# Altium PCB multivibrator.PcbDoc
Units mm, origin at the board's own origin, x right, y up, seen from the top; angles counter-clockwise.
Board outline 500 x 500 mm, 2 copper layers (Top Layer, Bottom Layer); 9 components, 6 nets, 20 pads, 0 vias.
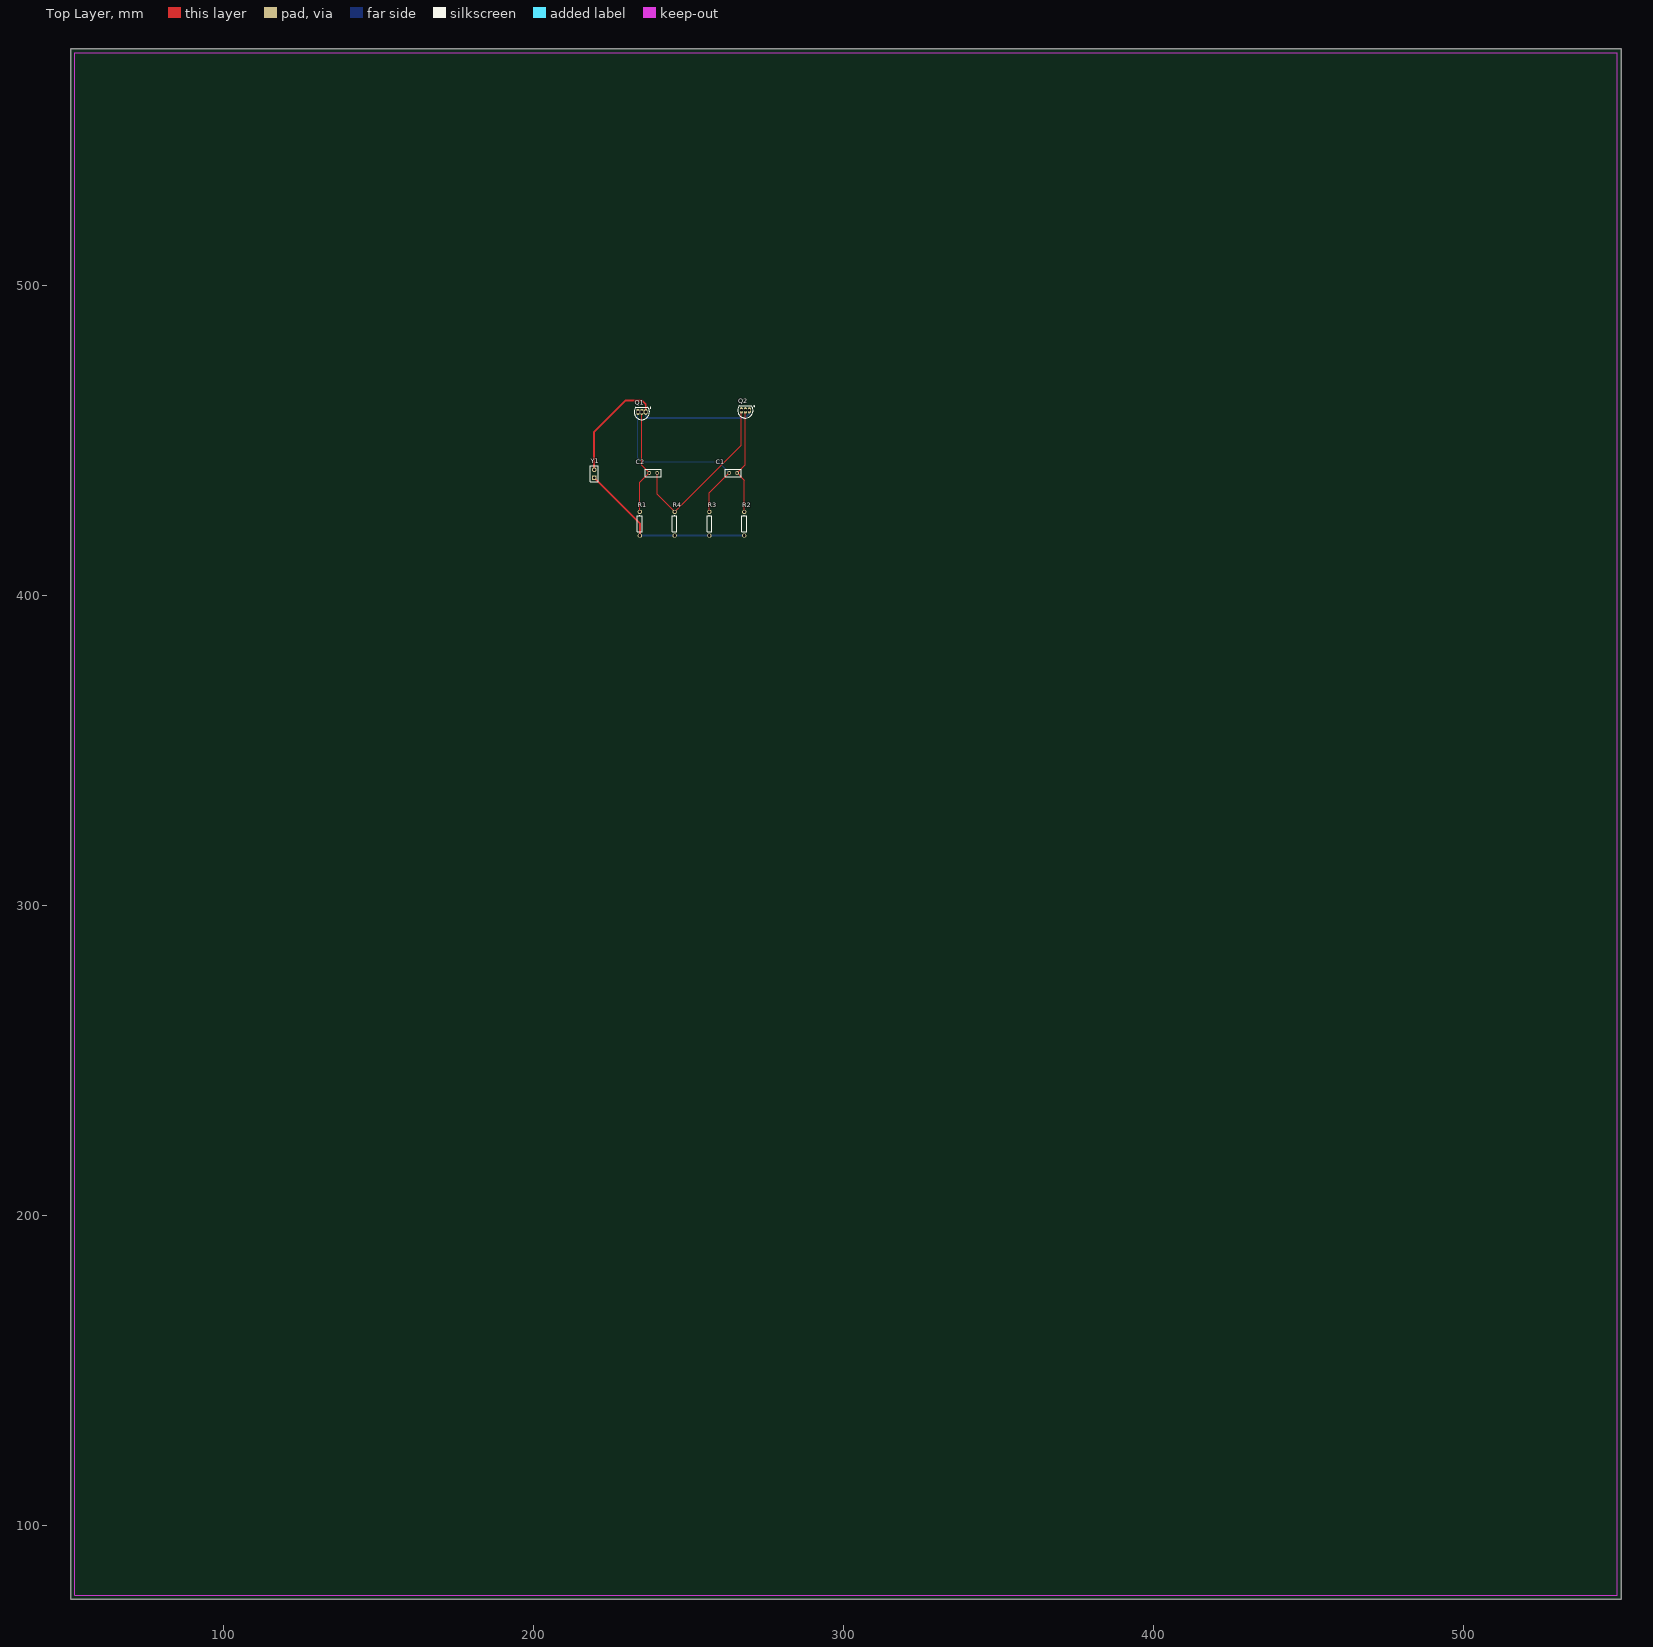
[diagram p0: Top Layer view]
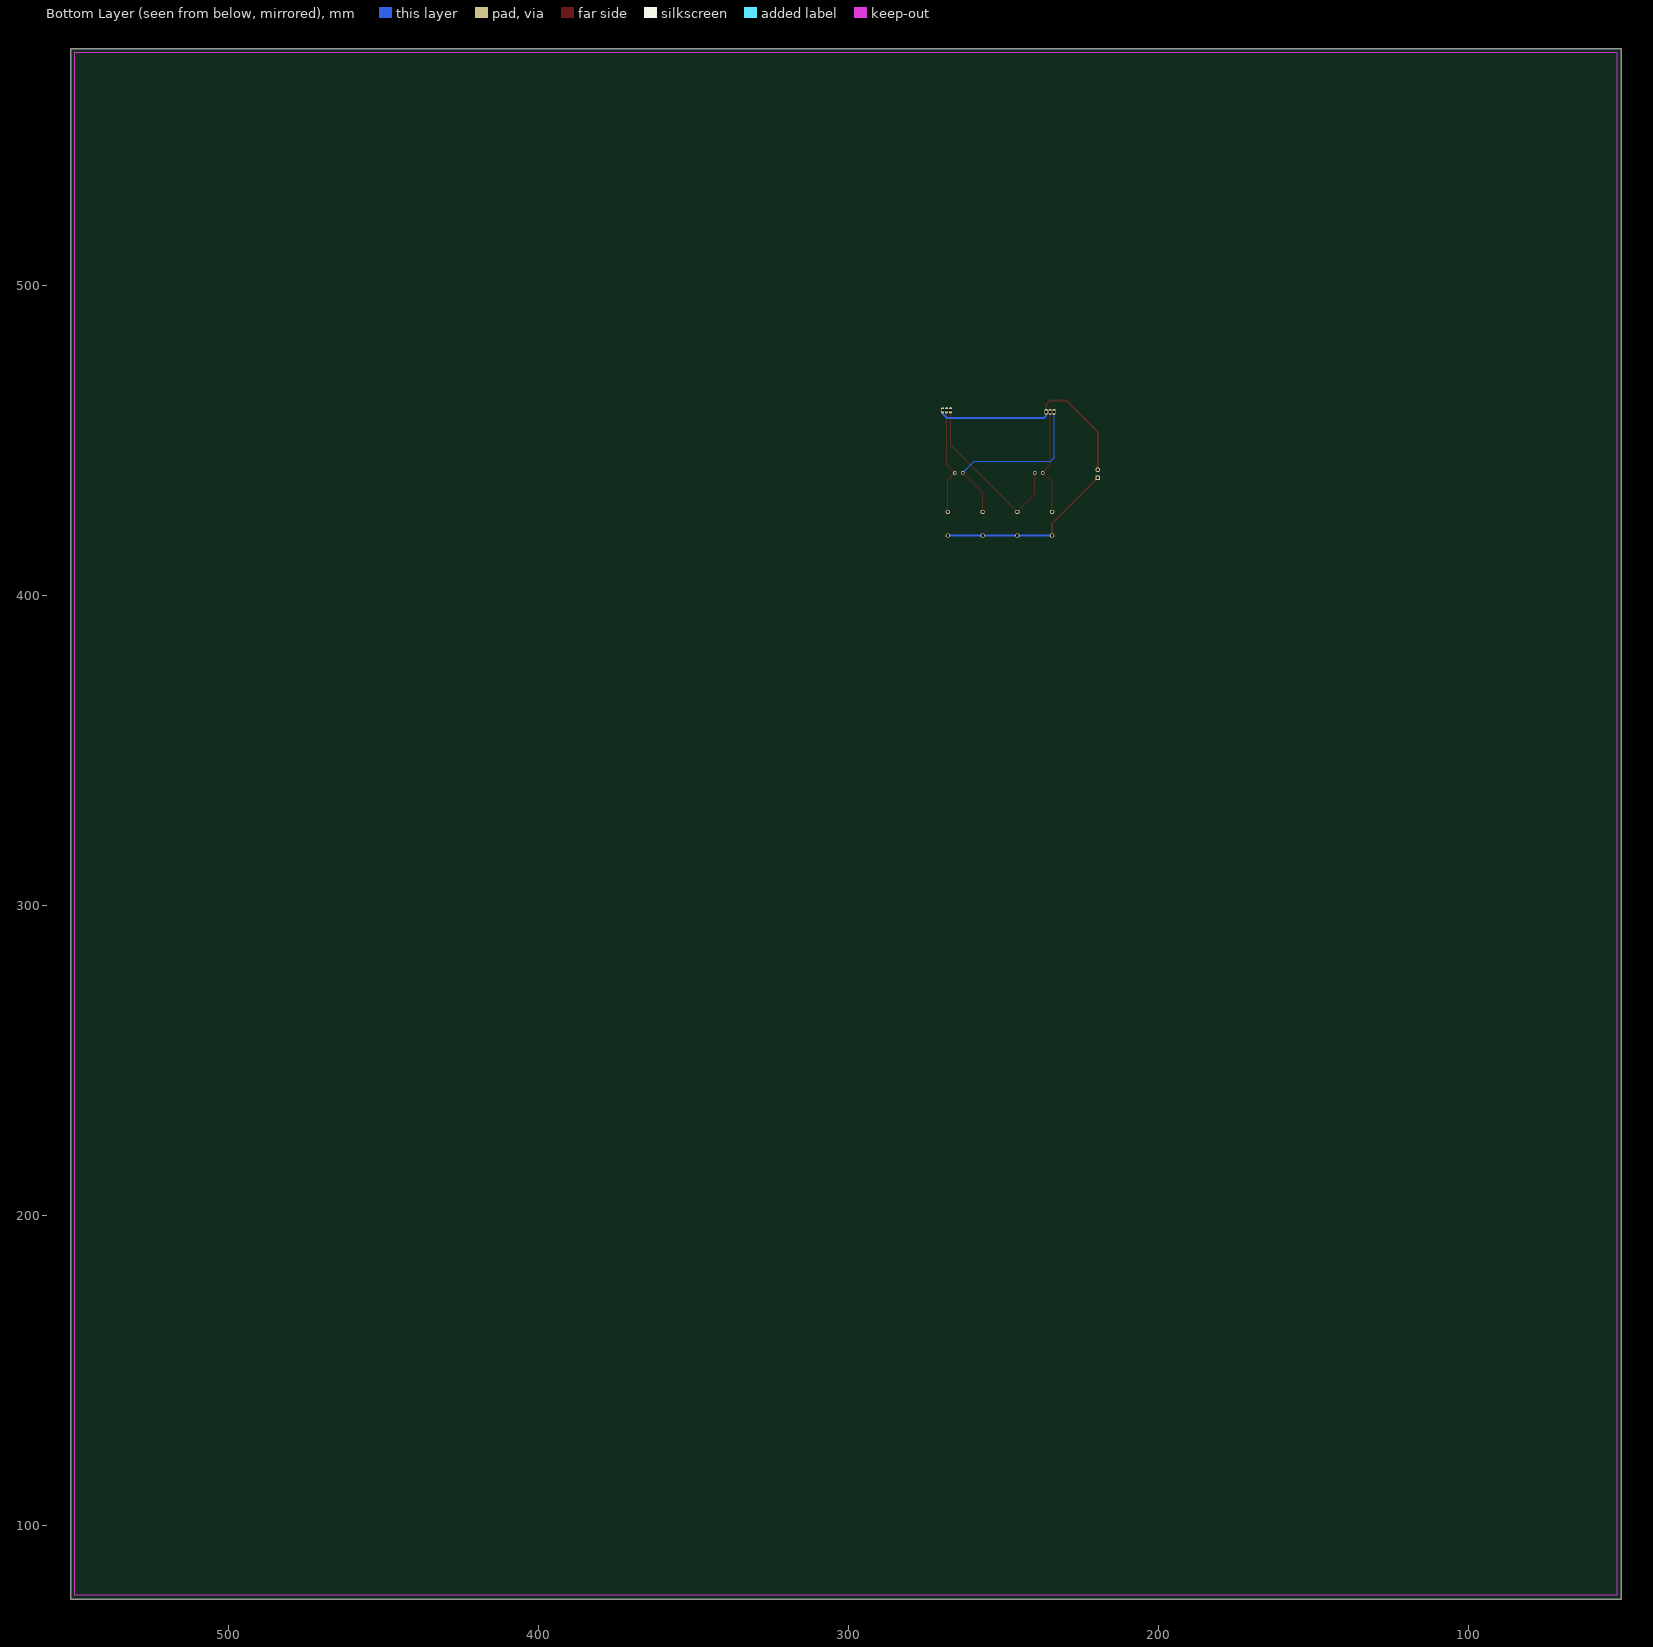
[diagram p1: Bottom Layer view, seen from below]

## Layer stack, top to bottom
Top Layer: signal copper 0.0356
Dielectric: dielectric 0.32, FR-4, Dk 4.8
Bottom Layer: signal copper 0.0356

## Board outline
50.8,76.2 550.8,76.2 550.8,576.2 50.8,576.2

## Design rules (kind name [scope] priority, off if disabled: settings)
Clearance Clearance_transistors [HasFootprint('TO-92A')] p1: gap=0.26
Clearance [All] p2: gap=0.3
MinimumSolderMaskSliver MinimumSolderMaskSliver_transistor [HasFootprint('TO-92A')] p1: minsoldermaskwidth=0.1
MinimumSolderMaskSliver [All] p2: minsoldermaskwidth=0.254
PolygonConnect [All] p1: connectstyle=Relief reliefconductorwidth=0.254 reliefentries=4 polygonreliefangle="90 Angle" airgapwidth=0.254
RoutingVias [All] p1: holewidth=0.8 width=1.6 viastyle="Through Hole" minholewidth=0.711 minwidth=1.27 maxholewidth=0.711 maxwidth=1.27
SilkToSolderMaskClearance [IsPad] p1: minsilkscreentomaskgap=0.24 clearancetoexposedcopper=TRUE
SolderMaskExpansion [All] p1: expansion=0.102
Width Width_power [(InNet('12V') OR InNet('GND'))] p1: maxlimit=1.27 minlimit=0.254 preferedwidth=0.635 minimp=50.000000 maximp=50.000000 favimp=50.000000
Width [All] p2: maxlimit=0.3 minlimit=0.3 preferedwidth=0.3
26 further rules are at their usual default settings.

## Components (designator, comment, footprint, x,y, rotation, side; value= is the part's Value field where it differs from the comment)
C1 "20n" RAD-0.1 264.414,439.42 r0 top
C2 "20n" RAD-0.1 238.633,439.42 r0 top
Q1 "2N3904" TO-92A 234.95,459.105 r90 top
Q2 "2N3904" TO-92A 268.351,459.613 r90 top
R1 "100k" AXIAL-0.3 234.315,423.037 r270 top
R2 "100k" AXIAL-0.3 267.97,423.037 r270 top
R3 "1k" AXIAL-0.3 256.752,423.037 r270 top
R4 "1k" AXIAL-0.3 245.533,423.037 r270 top
Y1 "Header 2" HDR1X2 219.583,437.896 r90 top

## Footprints (in the part's own frame and the unit in brackets; to place one, negate y for a bottom-side part, rotate by r counter-clockwise, add the part's x,y. Pads: shape width x height; smd on the part's side, far side on the other; paste and mask are expansions set on the pad)
AXIAL-0.3 [mm] "Axial Device, Thru-Hole; 2 Leads; 0.3 in Pin Spacing"
  round 1.4 hole 0.85: 1(-3.81,0) 2(3.81,0)
  silkscreen extent -2.77,-0.76 2.77,0.76
HDR1X2 [mm] "Connector; Header; 2 Position"
  rect 1.5x1.5 hole 0.9: 1(0,0)
  round 1.5 hole 0.9: 2(2.54,0)
  silkscreen extent -1.27,-1.27 3.81,1.27
RAD-0.1 [mm] "Radial Cap, Thru-Hole; 2 Leads; 0.1 in Pin Spacing"
  round 1.2 hole 0.7: 1(-1.27,0) 2(1.27,0)
  silkscreen extent -2.54,-1.27 2.54,1.27
TO-92A [mm] "TO, Flat Index; 3 In-Line, Axial Leads; Body Dia. 4.5mm; Leads 0.51 x 0.48 mm (max)"
  oval 2x1 hole 0.9: 1(0,-1.27) 2(0,0) 3(0,1.27)
  silkscreen extent -2.48,-2.96 1.5,2.48, body extent -2.5,-2.5 1.5,2.5, height 6.86

## Part data
C1 C2: library part Cap, "Capacitor"
Q1 Q2: "NPN General Purpose Amplifier"
R1 R2 R3 R4: library part Res1, "Resistor"
Y1: "Header, 2-Pin"

## Nets (pads, with @x,y where several pads share a name; then routed paths per layer and width w, separated by ;. In a path a pad name is that pad's centre, name@x,y a point inside that pad or via, vN(x,y) a via of type N, cw(c..) or ccw(c..) an arc to the next point about the centre after c; other vN are vias at no path point)
12V: R1.2 R2.2 R3.2 R4.2 Y1.1 | length 58.4
  Top Layer w0.635: Y1.1 234.315,423.164 R1.2
  Bottom Layer w0.635: R1.2 R4.2 R3.2 R2.2
GND: Q1.1 Q2.1 Y1.2 | length 72.6
  Top Layer w0.635: Y1.2 219.583,452.679 229.718,462.813 234.95,462.813 236.22,461.543 Q1.1
  Bottom Layer w0.635: Q1.1 236.22,457.835 236.855,457.2 268.351,457.2 269.621,458.47 Q2.1
NetC1_1: C1.1 Q1.3 R3.1 | length 61.5
  Top Layer w0.3: R3.1 256.752,433.028 C1.1
  Bottom Layer w0.3: Q1.3 233.68,444.246 234.95,442.976 259.588,442.976 C1.1
NetC1_2: C1.2 Q2.2 R2.1 | length 34.8
  Top Layer w0.3: R2.1 267.97,437.134 C1.2 268.351,442.087 Q2.2
NetC2_1: C2.1 Q1.2 R1.1 | length 34.5
  Top Layer w0.3: R1.1 234.315,436.372 C2.1 234.95,441.833 Q1.2
NetC2_2: C2.2 Q2.3 R4.1 | length 56.6
  Top Layer w0.3: C2.2 239.903,432.477 R4.1 267.081,448.395 Q2.3

## Keep-outs
Keep-Out Layer:
  lines w0.3: 52.1,77.5 52.1,574.9 549.5,574.9 549.5,77.5 52.1,77.5